# Altium PCB Capstone.PcbDoc
Units mil, origin at the board's own origin, x right, y up, seen from the top; angles counter-clockwise.
Board outline 3925 x 3665 mil, 2 copper layers (Top Layer, Bottom Layer), stack 61 mil thick; 57 components, 53 nets, 243 pads, 71 vias.
Unrouted connection lines stored in the file: 29.
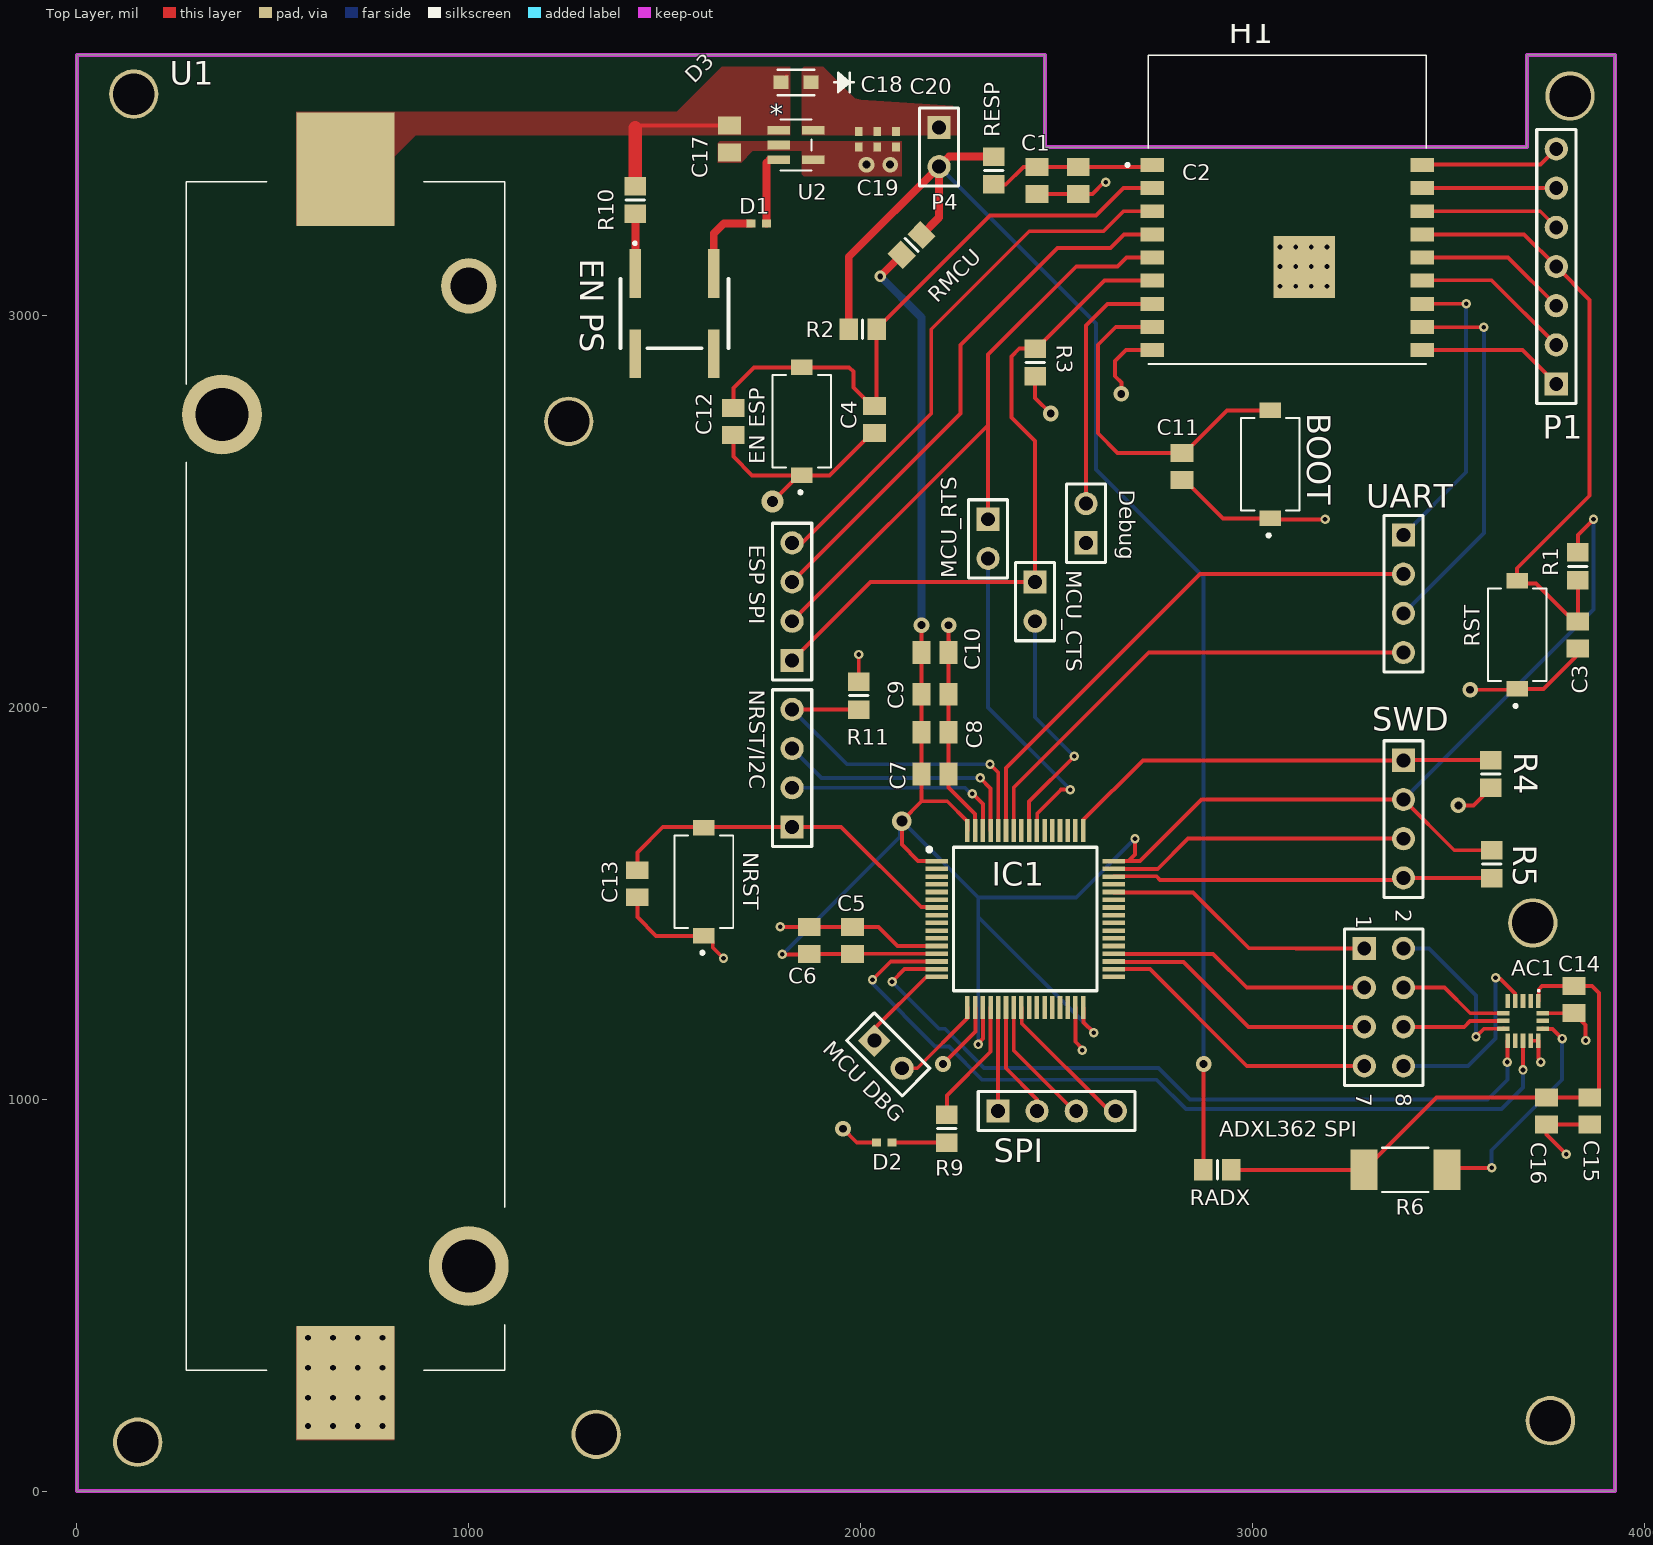
[diagram p0: Top Layer view]
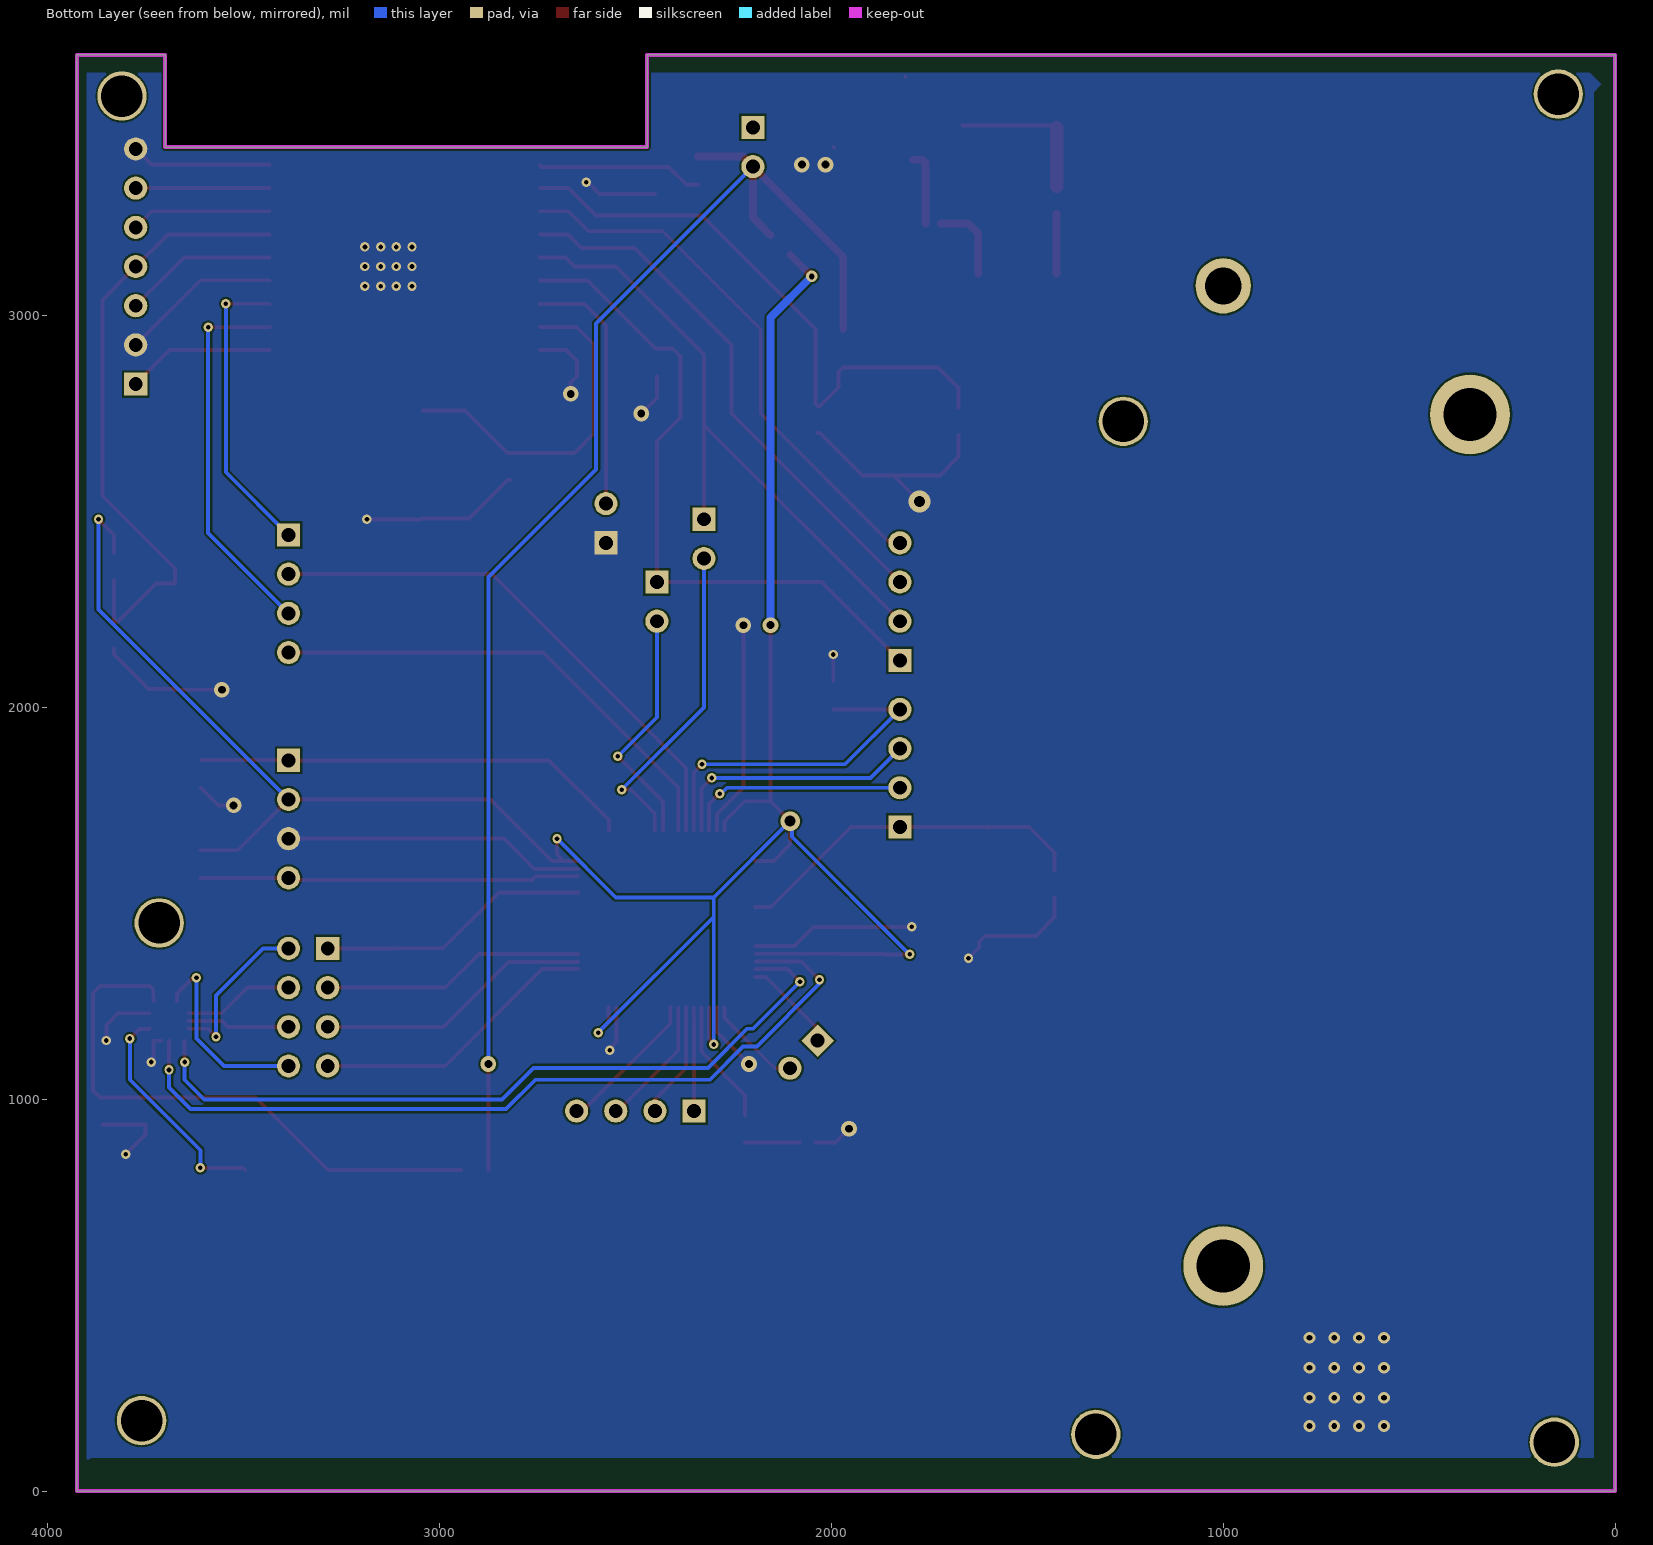
[diagram p1: Bottom Layer view, seen from below]

## Layer stack, top to bottom
Top Solder: solder mask 1, SM-001, Dk 4
Top Layer: signal copper 1.4
Dielectric 1: core 58.2, Core-043, Dk 4.3
Bottom Layer: signal copper 1.4
Bottom Solder: solder mask 1, SM-001, Dk 4

## Board outline
0,0 0,3665 2470,3665 2470,3430 3700,3430 3700,3665 3925,3665 3925,0
cut-out: -815,3120

## Design rules (kind name [scope] priority, off if disabled: settings)
Clearance [All] p1: gap=5 ignorepadtopadclearanceinfootprint=FALSE
DiffPairsRouting [All] p1: maxlimit=10 minlimit=5 mostfreqgap=10 toplayer_minwidth=15 toplayer_maxwidth=15 toplayer_prefwidth=15 bottomlayer_minwidth=15 bottomlayer_maxwidth=15 bottomlayer_prefwidth=15 maxuncoupledlength=500
HoleSize [All] p1: absolutevalues=TRUE maxlimit=200 minlimit=1 maxpercent=80.000 minpercent=20.000
MinimumSolderMaskSliver [All] p1: minsoldermaskwidth=0
PolygonConnect [All] p1: connectstyle=Direct reliefconductorwidth=10 reliefentries=4 polygonreliefangle="90 Angle" airgapwidth=10
RoutingVias [All] p1: holewidth=12 width=24 viastyle="Through Hole" minholewidth=12 minwidth=24 maxholewidth=28 maxwidth=50
SilkToSolderMaskClearance [IsPad] p1: minsilkscreentomaskgap=5 clearancetoexposedcopper=TRUE
SolderMaskExpansion [All] p1: expansion=4
Width [All] p1: maxlimit=35 minlimit=5 preferedwidth=10
26 further rules are at their usual default settings.

## Components (designator, comment, footprint, x,y, rotation, side; value= is the part's Value field where it differs from the comment)
AC1 "ADXL362BCCZ-RL7" CC-16-4 3690,1200 r270 top
"ADXL362 SPI" "Header 4X2" HDR2X4 3285,1385 r270 top
BOOT "KSR222GLFS" *SW_KSR223GLFG 3045,2620 r90 top
C1 "Cap" *CAPC2012X88N 2450,3345 r270 top value=10uF
C2 "Cap" *CAPC2012X88N 2555,3345 r270 top value=0.1uF
C3 "Cap" *CAPC2012X88N 3830,2185 r270 top value=0.1uF
C4 "Cap" *CAPC2012X88N 2035,2735 r270 top value=0.1uF
C5 "Cap" *CAPC2012X88N 1979,1405.55 r270 top value=10nF
C6 "Cap" *CAPC2012X88N 1869,1405.55 r270 top value=1uF
C7 "Cap" *CAPC2012X88N 2190,1830 r180 top value=4.7uF
C8 "Cap" *CAPC2012X88N 2190,1936.67 r180 top value=100nF
C9 "Cap" *CAPC2012X88N 2190,2033.33 r180 top value=100nF
C10 "Cap" *CAPC2012X88N 2190,2140 r180 top value=100nF
C11 "Cap" *CAPC2012X88N 2820,2615 r90 top value=0.1uF
C12 "Cap" *CAPC2012X88N 1675,2730 r90 top value=0.1uF
C13 "Cap" *CAPC2012X88N 1430,1550 r90 top value=0.1uF
C14 "Cap" *CAPC2012X88N 3820,1254.45 r270 top value=1uF
C15 "Cap" *CAPC2012X88N 3860,970 r90 top value=0.1uF
C16 "Cap" *CAPC2012X88N 3750,970 r270 top value=1uF
C17 "Cap" *CAPC2012X88N 1665,3450 r90 top value=1uF
C18 "Cap" 0402 1995,3450 r90 top value=10uF
C19 "Cap" 0402 2042.5,3450 r90 top value=10uF
C20 "Cap" 0402 2090,3450 r90 top value=4.7uF
D1 "RED_LED" 0402 1740,3235 r0 top
D2 "GREEN_LED" 0402 2060,890 r180 top
D3 "RED_LED" SD0805 1835,3595 r180 top
Debug "Header 2" HDR1X2 2575,2420 r90 top
"EN ESP" "KSR222GLFS" *SW_KSR223GLFG 1850,2730 r90 top (schematic designator EN_ESP)
"EN PS" "GT12MSCBETR" GT11MSCBE 1525,3005 r90 top
"ESP SPI" "Header 4" HDR1X4 1825,2120 r90 top
H1 "ESP-WROOM-02D" ESPWROOM02D 3060,3270 r0 top locked
IC1 "STM32L433RCT6" QFP50P1200X1200X160-64N 2420,1460 r0 top locked
"MCU DBG" "Debug" HDR1X2 2035,1150 r315 top
MCU_CTS "Header 2" HDR1X2 2445,2320 r270 top
MCU_RTS "Header 2" HDR1X2 2325,2480 r270 top
NRST "KSR222GLFS" *SW_KSR223GLFG 1600,1555 r90 top
NRST/I2C "Header 4" HDR1X4 1825,1695 r90 top
P1 "Comment" HDR1X7 3775,2825 r90 top
P4 "Header 2" HDR1X2 2200,3480 r270 top
R1 "Res1" 6-0805_N 3830,2360 r270 top value=10K
R2 "Res1" 6-0805_N 2005,2965 r0 top value=10K
R3 "Res1" 6-0805_N 2445,2880 r90 top value=10K
R4 "Res1" 6-0805_N 3608.05,1830 r270 top value=10K
R5 "Res1" 6-0805_N 3610,1600 r90 top value=10k
R6 "Res1" RES_WSC_2515 3390,820 r180 top value=50
R9 "Res1" 6-0805_N 2220,925 r90 top value=470
R10 "Res1" 6-0805_N 1425,3295 r270 top value=470
R11 "Res1" 6-0805_N 1995,2030 r90 top value=10K
RADX "3.3K" 6-0805_N 2910,820 r180 top
RESP "" 6-0805_N 2340,3370 r90 top value=0
RMCU "Res1" 6-0805_N 2130,3180 r45 top value=0
RST "KSR222GLFS" *SW_KSR223GLFG 3675,2185 r90 top
SPI "" HDR1X4 2350,970 r0 top
SWD "Comment" HDR1X4 3385,1865 r270 top
U1 "1042P" 1042P 685,1825 r90 top
U2 "Part Number: TLV75533PDBVR" DBV5 1835,3435 r0 top value=Value
UART "Comment" HDR1X4 3385,2440 r270 top

## Footprints (in the part's own frame and the unit in brackets; to place one, negate y for a bottom-side part, rotate by r counter-clockwise, add the part's x,y. Pads: shape width x height; smd on the part's side, far side on the other; paste and mask are expansions set on the pad)
6-0805_N [mm] "Chip Resistor, Body 2.0x1.2mm, IPC Medium Density"
  rect 1.2x1.4 smd: 1(-0.9,0) 2(0.9,0)
  silkscreen extent 0,-0.6 0,0.6, body extent -1.07,-0.7 1.07,0.7, height 0.7
0402 [mm] "Chip Capacitor, Body 1.0x0.5mm, IPC High Density"
  rect 0.6x0.5 smd: 1(-0.5,0) 2(0.5,0)
  body extent -0.55,-0.3 0.55,0.3, height 1.3
1042P [mm]
  round 5.175 hole 3.45: 1(-31.765,-8) 2(23.435,8)
  round 3.585 hole 2.39: 3(31.765,-8)
  rect 7.34x6.35 smd: 4(-39.33,0) 5(39.33,0)
  silkscreen extent -38.53,-10.33 38.53,10.33, body extent -42.37,-10.33 42.37,10.33, height 14.1
*CAPC2012X88N [mm]
  rect 1.16x1.47 smd: 1(-0.875,0) 2(0.875,0)
*SW_KSR223GLFG [mm]
  rect 1x1.4 smd: 1(-3.5,0) 2(3.5,0)
  silkscreen extent -4.7,-1.9 3,1.9
CC-16-4 [mm]
  rect 0.925x0.3 smd: 1(-1.288,1) 2(-1.288,0.5) 3(-1.288,0) 4(-1.288,-0.5) 5(-1.288,-1) 9(1.287,-1) 10(1.287,-0.5) 11(1.287,0) 12(1.287,0.5) 13(1.287,1)
  rect 0.3x0.8 smd: 6(-0.5,-1.275) 7(0,-1.275) 8(0.5,-1.275) 14(0.5,1.275) 15(0,1.275) 16(-0.5,1.275)
  silkscreen extent -1.98,1 -1.93,1.04
DBV5 [mil]
  rect 58x22 smd paste+0 mask+0: 1(-44,37.4) 2(-44,0) 3(-44,-37.4) 4(44,-37.4) 5(44,37.4)
  silkscreen extent -40,-65 40,65, body extent 0,0 10,10, height 10
ESPWROOM02D [mm]
  rect 1.5x0.9 smd: 1(-8.025,2.9) 2(-8.025,1.4) 3(-8.025,-0.1) 4(-8.025,-1.6) 5(-8.025,-3.1) 6(-8.025,-4.6) 7(-8.025,-6.1) 8(-8.025,-7.6) 9(-8.025,-9.1) 10(9.475,-9.1) 11(9.475,-7.6) 12(9.475,-6.1) 13(9.475,-4.6) 14(9.475,-3.1) 15(9.475,-1.6) 16(9.475,-0.1) 17(9.475,1.4) 18(9.475,2.9)
  rect 4x4 smd: 19(1.825,-3.71)
  silkscreen extent -9.72,-10 9.72,10
GT11MSCBE [mm]
  rect 3.17x0.76 smd: 1(2.605,2.54) 3(2.605,-2.54) 4(-2.605,2.54) 6(-2.605,-2.54)
  silkscreen extent -2.25,-3.5 4.61,3.5
HDR1X2 [mm] "Connector; Header; 2 Position"
  rect 1.5x1.5 hole 0.9: 1(0,0)
  round 1.5 hole 0.9: 2(2.54,0)
  silkscreen extent -1.27,-1.27 3.81,1.27
HDR1X4 [mm] "Connector; Header; 4 Position"
  rect 1.5x1.5 hole 0.9: 1(0,0)
  round 1.5 hole 0.9: 2(2.54,0) 3(5.08,0) 4(7.62,0)
  silkscreen extent -1.27,-1.27 8.89,1.27
HDR1X7 [mm] "Connector; Header; 7 Position"
  rect 1.5x1.5 hole 0.9: 1(0,0)
  round 1.5 hole 0.9: 2(2.54,0) 3(5.08,0) 4(7.62,0) 5(10.16,0) 6(12.7,0) 7(15.24,0)
  silkscreen extent -1.27,-1.27 16.51,1.27
HDR2X4 [mm] "Connector; Header; 4x2 Position"
  rect 1.5x1.5 hole 0.9: 1(0,0)
  round 1.5 hole 0.9: 2(0,2.54) 3(2.54,0) 4(2.54,2.54) 5(5.08,0) 6(5.08,2.54) 7(7.62,0) 8(7.62,2.54)
  silkscreen extent -1.27,-1.27 8.89,3.81
QFP50P1200X1200X160-64N [mm]
  rect 1.475x0.3 smd: 1(-5.738,3.75) 2(-5.738,3.25) 3(-5.738,2.75) 4(-5.738,2.25) 5(-5.738,1.75) 6(-5.738,1.25) 7(-5.738,0.75) 8(-5.738,0.25) 9(-5.738,-0.25) 10(-5.738,-0.75) 11(-5.738,-1.25) 12(-5.738,-1.75) 13(-5.738,-2.25) 14(-5.738,-2.75) 15(-5.738,-3.25) 16(-5.738,-3.75) 33(5.738,-3.75) 34(5.738,-3.25) 35(5.738,-2.75) 36(5.738,-2.25) 37(5.738,-1.75) 38(5.738,-1.25) 39(5.738,-0.75) 40(5.738,-0.25) 41(5.738,0.25) 42(5.738,0.75) 43(5.738,1.25) 44(5.738,1.75) 45(5.738,2.25) 46(5.738,2.75) 47(5.738,3.25) 48(5.738,3.75)
  rect 0.3x1.475 smd: 17(-3.75,-5.738) 18(-3.25,-5.738) 19(-2.75,-5.738) 20(-2.25,-5.738) 21(-1.75,-5.738) 22(-1.25,-5.738) 23(-0.75,-5.738) 24(-0.25,-5.738) 25(0.25,-5.738) 26(0.75,-5.738) 27(1.25,-5.738) 28(1.75,-5.738) 29(2.25,-5.738) 30(2.75,-5.738) 31(3.25,-5.738) 32(3.75,-5.738) 49(3.75,5.738) 50(3.25,5.738) 51(2.75,5.738) 52(2.25,5.738) 53(1.75,5.738) 54(1.25,5.738) 55(0.75,5.738) 56(0.25,5.738) 57(-0.25,5.738) 58(-0.75,5.738) 59(-1.25,5.738) 60(-1.75,5.738) 61(-2.25,5.738) 62(-2.75,5.738) 63(-3.25,5.738) 64(-3.75,5.738)
  silkscreen extent -6.35,-4.65 4.65,4.65, body extent -6,-6 6,6, height 1.6
RES_WSC_2515 [mil]
  rect 69x103 smd paste+0 mask+0: 1(-105.5,0) 2(105.5,0)
  silkscreen extent -59,-57 59,57, body extent 0,0 10,10, height 10
SD0805 [mil]
  rect 37.5x35 smd paste+0 mask+0: 1(-38.25,0) 2(38.25,0)
  silkscreen extent -147,-33 47,33, body extent 0,0 10,10, height 10

## Part data
AC1: "Accelerometer", Manufacturer_Name="Analog Devices", Mouser Part Number=584-ADXL362BCCZ-R7, Datasheet Link=http://www.analog.com/media/en/technical-documentation/data-sheets/ADXL362.pdf, Manufacturer_Part_Number=ADXL362BCCZ-RL7, Mouser Price/Stock=https://www.mouser.com/Search/Refine.aspx?Keyword=584-ADXL362BCCZ-R7
"ADXL362 SPI": "Header, 4-Pin, Dual row", LatestRevisionDate=17-Jul-2002, LatestRevisionNote="Re-released for DXP Platform.", Publisher="Altium Limited"
BOOT "EN ESP" NRST RST: library part KSR223GLFG, "Switch Tactile N.O. SPST Round Button Gull Wing 0.01A 32VDC 0.2VA 200000Cycles 2N SMD Automotive T/R", Package=None, Digi-Key_Part_Number=401-1704-1-ND, Digi-Key_Purchase_URL=https://www.digikey.com/product-detail/en/c-k/KSR223GLFG/401-1704-1-ND/958078?utm_source=snapeda&utm_medium=aggregator&utm_campaign=symbol, MF=C&K, MP=KSR223GLFG, SnapEDA_Link=https://www.snapeda.com/parts/KSR223GLFG/C%26K/view-part/?ref=snap
C1 C2 C3 C4 C5 C6 C7 C8 C9 C10 C11 C12 C13 C14 C15 C16 C17 C18 C19 C20: "Capacitor", LatestRevisionDate=17-Jul-2002, LatestRevisionNote="Re-released for DXP Platform.", PackageDescription="Radial Cap, Thru-Hole; 2 Leads; 0.3 in Pin Spacing", PackageReference=RAD-0.3, Published=8-Jun-2000, Publisher="Altium Limited"
D1 D2: library part LED3, "Typical BLUE SiC LED", DatasheetVersion=16-Apr-2002, LatestRevisionDate=17-Dec-2003, LatestRevisionNote="PCB Footprint replaced.", PackageDescription="SM LED; 2 C-Bend Leads; Body 3.5 x 2.8 x 1.9 mm, inc leads (LxWxH typ)", PackageReference=3.5X2.8X1.9, PackageVersion=16-Apr-2002, Published=8-Jun-2000, Publisher="Altium Limited"
D3: library part "D Schottky", "Schottky Diode", Code_JEDEC=DO-214-AA, LatestRevisionDate=17-Jul-2002, LatestRevisionNote="Re-released for DXP Platform.", PackageDescription="DO-214-AA/SMB; 2 C-Bend Leads; Body 5.3 x 3.6 mm, inc. leads (LxW)", PackageReference=SMB, Published=8-Jun-2000, Publisher="Altium Limited"
Debug MCU_CTS MCU_RTS P4: "Header, 2-Pin", LatestRevisionDate=17-Jul-2002, LatestRevisionNote="Re-released for DXP Platform.", Publisher="Altium Limited"
"EN PS": "Switch", Manufacturer_Name="C & K COMPONENTS", Mouser Part Number=611-GT12MSCBETR, Datasheet Link=https://componentsearchengine.com/Datasheets/1/GT12MSCBETR.pdf, Manufacturer_Part_Number=GT12MSCBETR, Mouser Price/Stock=https://www.mouser.com/Search/Refine.aspx?Keyword=611-GT12MSCBETR
"ESP SPI" NRST/I2C: "Header, 4-Pin", LatestRevisionDate=17-Jul-2002, LatestRevisionNote="Re-released for DXP Platform.", Publisher="Altium Limited"
H1: "Hardware", Manufacturer_Name=Espressif, Mouser Part Number=356-ESPWROOM-02D, Datasheet Link=https://br.mouser.com/datasheet/2/891/esp-wroom-02d_esp-wroom-02u_datasheet_en-1365835.pdf, Height=3.2mm, Manufacturer_Part_Number=ESP-WROOM-02D
IC1: "Integrated Circuit", Manufacturer_Name=STMicroelectronics, Mouser Part Number=511-STM32L433RCT6, Datasheet Link=https://www.st.com/resource/en/datasheet/stm32l433rc.pdf, Height=1.6mm, Manufacturer_Part_Number=STM32L433RCT6, Mouser Price/Stock=https://www.mouser.com/Search/Refine.aspx?Keyword=511-STM32L433RCT6
"MCU DBG": library part "Header 2", "Header, 2-Pin", LatestRevisionDate=17-Jul-2002, LatestRevisionNote="Re-released for DXP Platform.", Publisher="Altium Limited"
P1: library part "Header 7", "Header, 7-Pin", LatestRevisionDate=17-Jul-2002, LatestRevisionNote="Re-released for DXP Platform.", Publisher="Altium Limited"
R1 R2 R3 R4 R5 R6 R9 R10 R11 RMCU: "Resistor", LatestRevisionDate=17-Jul-2002, LatestRevisionNote="Re-released for DXP Platform.", PackageDescription="Axial Device, Thru-Hole; 2 Leads; 0.3 in Pin Spacing", PackageReference=AXIAL-0.3, Published=8-Jun-2000, Publisher="Altium Limited"
RADX RESP: library part Res1, "Resistor", LatestRevisionDate=17-Jul-2002, LatestRevisionNote="Re-released for DXP Platform.", PackageDescription="Axial Device, Thru-Hole; 2 Leads; 0.3 in Pin Spacing", PackageReference=AXIAL-0.3, Published=8-Jun-2000, Publisher="Altium Limited"
SPI SWD UART: library part "Header 4", "Header, 4-Pin", LatestRevisionDate=17-Jul-2002, LatestRevisionNote="Re-released for DXP Platform.", Publisher="Altium Limited"
U1: "Undefined or Miscellaneous", Manufacturer_Name="Keystone Electronics", Mouser Part Number=534-1042P, Allied_Number=71135189, Allied Price/Stock=https://www.alliedelec.com/keystone-electronics-1042p/71135189/, Datasheet Link=http://www.keyelco.com/product-pdf.cfm?p=13957, Height=14mm, Manufacturer_Part_Number=1042P, Mouser Price/Stock=https://www.mouser.com/Search/Refine.aspx?Keyword=534-1042P
U2: library part TLV75533PDBVR, "No Description Available", Copyright="Copyright (C) 2018 Accelerated Designs. All rights reserved", Manufacturer_Part_Number=TLV75533PDBVR, RefDes=RefDes, Type=DEV, Vendor="Texas Instruments"

## Free pads (board coordinates)
  round 126 hole 106 unplated: 1(145,3565) 2(155,125) 3(1255,2730) 4(1325,145) 5(3760,180) 6(3715,1450) 7(3810,3560)

## Via types
v1: diameter 24, hole 12, Top Layer to Bottom Layer, 41 vias
v2: diameter 30, hole 15, Top Layer to Bottom Layer, 17 vias
v3: diameter 40, hole 20, Top Layer to Bottom Layer, 11 vias
v4: diameter 50, hole 28, Top Layer to Bottom Layer, 1 vias
v5: diameter 56, hole 28, Top Layer to Bottom Layer, 1 vias

## Nets (pads, with @x,y where several pads share a name; then routed paths per layer and width w, separated by ;. In a path a pad name is that pad's centre, name@x,y a point inside that pad or via, vN(x,y) a via of type N, cw(c..) or ccw(c..) an arc to the next point about the centre after c; other vN are vias at no path point)
ADXL362_CS: "ADXL362 SPI.2" AC1.8 | length 417.9
  Top Layer w10: v1(3570,1160) 3590,1180 3639.49,1180 AC1.8
  Bottom Layer w10: 3385,1385 3450,1385 3570,1265 v1(3570,1160)
ADXL362_INT1: AC1.11 IC1.14 | length 2128.1
  Top Layer w10: v1(2030,1305) 2076.73,1351.73 IC1.14 ; v1(3690,1075) AC1.11
  Bottom Layer w10: v1(2030,1305) 2030,1295 2190,1135 2225,1135 2310,1050 2755,1050 2830,975 3635,975 3690,1030 v1(3690,1075)
ADXL362_INT2: AC1.9 IC1.15 | length 1941.9
  Top Layer w10: v1(2080,1300) 2112.05,1332.05 IC1.15 ; v1(3650,1095) 3650.63,1095.63 AC1.9
  Bottom Layer w10: v1(2080,1300) 2200,1180 2215,1180 2315,1080 2760,1080 2840,1000 3600,1000 3650,1050 v1(3650,1095)
ADXL362_MISO: "ADXL362 SPI.6" AC1.7 | length 261
  Top Layer w10: 3385,1185 3540,1185 3555,1200 AC1.7
ADXL362_MOSI: "ADXL362 SPI.4" AC1.6 | length 281.9
  Top Layer w10: 3385,1285 3490,1285 3555.31,1219.69 AC1.6
ADXL362_SCK: "ADXL362 SPI.8" AC1.4 | length 504.8
  Top Layer w10: v1(3620,1310) 3622.68,1307.32 3632.26,1307.32 3669.41,1270.17 3669.41,1251.6 AC1.4
  Bottom Layer w10: 3385,1085 3550,1085 3620,1155 v1(3620,1310)
EN: "EN ESP.2" C4.1 C12.2 H1.2 R2.2 | length 1547.7
  Top Layer w10: C12.2 1675,2815 1727.8,2867.8 1850,2867.8 1970.55,2867.8 1981.67,2856.67 1981.67,2816.67 2028.9,2769.45 C4.1 2040.43,2774.88 R2.2 2040.43,2965.94 2329.49,3255 2600,3255 2670.12,3325.12 H1.2
GND: "EN ESP.1" AC1.12 AC1.13 AC1.16 BOOT.1 C1.2 C2.2 C3.2 C4.2 C5.1 C6.1 C7.1 C8.1 C9.1 C10.1 C11.1 C12.1 C13.1 C14.2 C15.1 C16.2 C17.1 C18.1 C19.1 C20.1 D2.2 Debug.1 H1.9 H1.13 H1.18 H1.19 IC1.12 IC1.18 IC1.31 IC1.47 IC1.63 NRST.1 P1.2 P1.7 R3.1 R4.2 R11.2 RST.1 SWD.3 U1.4 U2.2 U2.4 | length 5657.2
  Top Layer w10: C13.1 1430,1465 1477.8,1417.2 NRST.1 1607.87,1417.2 1622.56,1402.52 1622.56,1387.44 v1(1650,1360) ; C12.1 1675,2640 1722.8,2592.2 1850,2592.2 1920.55,2592.2 2028.9,2700.55 C4.2 ; v5(1775,2525) 1775,2525.08 1839.92,2590 ; v1(1795,1440) C6.1 C5.1 2045,1440 2093.9,1391.1 IC1.12 ; v3(1955,925) 1990,890 D2.2 ; C18.1@1992.5,3427.81 C18.1 ; R11.2 v1(1995,2135) ; v3(2210,1090) 2292.79,1172.79 2292.79,1233.36 IC1.18 ; v3(2224.45,2209.45) 2224.45,2171.1 2225,2170.55 2224.45,2170 C10.1 C9.1 C8.1 C7.1 2224.45,1795.55 2292.05,1727.95 IC1.63 ; R3.1 2445,2790 v3(2485,2750) ; C1.2 C2.2 2591.76,3310.55 2621.21,3340 v1(2625,3340) ; IC1.31 2547.95,1146.92 2565,1129.87 v1(2565,1125) ; IC1.47 2757.95,1587.95 2835,1665 SWD.3 ; v3(2665,2800) 2665,2829.14 2649.14,2845 2649.14,2884.14 2676.73,2911.73 H1.9 ; C11.1 2826.1,2580.55 2924.45,2482.2 BOOT.1 3047.2,2480 v1(3185,2480) ; H1.13 3434.13,3090 3610,3090 P1.2 ; H1.18 3433.86,3385 3735,3385 P1.7 ; v3(3525,1750) 3563.49,1750 R4.2 ; v3(3555,2045) 3677.2,2045 RST.1 3741.81,2047.2 3830,2135.39 C3.2 ; AC1.12 AC1.13 3729.37,1104.42 3735,1098.79 v1(3735,1095) ; AC1.16 3819.69,1219.69 3850,1189.37 v1(3850,1150) ; C16.2 C16.2@3756.1,935.55 ; v1(3800,860) 3750,910 3750,929.45 C16.2@3756.1,935.55 ; C15.1 C16.2@3756.1,935.55
  other v1: 3070,3075 3110,3075 3150,3075 3190,3075 3070,3125 3110,3125 3150,3125 3190,3125 3070,3175 3110,3175 3150,3175 3190,3175
  other v2: 590,166.67 653.33,166.67 716.67,166.67 780,166.67 590,238.33 653.33,238.33 716.67,238.33 780,238.33 590,315 653.33,315 716.67,315 780,315 590,391.67 653.33,391.67 716.67,391.67 780,391.67
  other v3: 2015,3385 2075,3385
I2C1_SCL: IC1.61 NRST/I2C.3 | length 656.1
  Top Layer w10: v1(2305,1820) 2331.42,1793.58 IC1.61
  Bottom Layer w10: NRST/I2C.3 1900,1820 v1(2305,1820)
I2C1_SDA: IC1.62 NRST/I2C.2 | length 571.4
  Top Layer w10: v1(2285,1780) 2311.73,1753.27 IC1.62
  Bottom Layer w10: NRST/I2C.2 2266.21,1795 2281.21,1780 v1(2285,1780)
IO0: BOOT.2 C11.2 H1.8 | length 886
  Top Layer w10: H1.8 2650.79,2970.79 2605,2925 2605,2700 2655.55,2649.45 C11.2 2826.1,2649.45 2934.45,2757.8 BOOT.2@3042.2,2757.8
IO2: Debug.2 H1.7 | length 646.8
  Top Layer w10: Debug.2 2575,2975 2629.84,3029.84 H1.7
IO4: H1.10 P1.1 | length 377.9
  Top Layer w10: H1.10 3688.27,2911.73 P1.1
IO5: H1.14 P1.3 | length 392.9
  Top Layer w10: H1.14 3652.05,3147.95 P1.3
IO12: "ESP SPI.3" H1.4 | length 1389
  Top Layer w10: 1825,2320 2255,2750 2255,2925 2502.5,3172.5 2637.5,3172.5 2672.01,3207.01 H1.4
IO13: "ESP SPI.2" H1.5 MCU_RTS.1 | length 1648.9
  Top Layer w10: 1825,2220 2325,2720 ; MCU_RTS.1 2325,2720 ; H1.5 2677.95,3147.95 2655,3125 2550,3125 2325,2900 2325,2720
IO14: "ESP SPI.4" H1.3 | length 1395.5
  Top Layer w10: 1825,2420 1850,2420 2180,2750 2180,2965 2430,3215 2620,3215 2671.06,3266.06 H1.3
IO15: "ESP SPI.1" H1.6 MCU_CTS.1 R3.2 | length 1742.6
  Top Layer w10: 1825,2120 2025,2320 MCU_CTS.1 2445,2680 2385,2740 2385,2895.87 2404.57,2915.43 R3.2 2448.94,2915.43 2622.4,3088.9 H1.6
IO16: H1.17 P1.6 | length 342
  Top Layer w10: H1.17 3433.15,3325 P1.6
NetAC1_1: AC1.1 C14.1 C15.2 C16.1 R6.2 RADX.1 | length 1465.7
  Top Layer w10: RADX.1 R6.2 3468.95,1004.45 C16.1 C15.2 3866.1,1004.45 3883.94,1022.28 3883.94,1271.06 3866.1,1288.9 C14.1 3738.9,1288.9 3730.28,1280.28 3730.28,1263.9 3729.37,1262.99 AC1.1
NetAC1_14: AC1.14 R6.1 | length 581.4
  Top Layer w10: R6.1 3500.5,825 v1(3610,825) ; AC1.14 3741.1,1179.41 3765.59,1179.41 v1(3790,1155)
  Bottom Layer w10: v1(3610,825) 3610,870 3790,1050 v1(3790,1155)
NetBT1_1: C17.2 D3.2 R10.1 U1.5 U2.1 | length 390.6
  Top Layer w10: 1425,3478.59 1430.86,3484.45 C17.2
  Top Layer w35: R10.1 1425,3478.59
NetC1_1: C1.1 C2.1 H1.1 RESP.1 | length 424.6
  Top Layer w10: RESP.1 2370.12,3334.57 2415,3379.45 C1.1 C2.1 2739.33,3379.45 H1.1
NetC13_2: C13.2 IC1.7 NRST.2 NRST/I2C.1 | length 923.5
  Top Layer w10: C13.2 1430,1630 1495,1695 1597.8,1695 NRST.2 1602.2,1695 NRST/I2C.1 1950,1695 2154.57,1490.43 2193.19,1490.43 IC1.7
NetC18_2: C18.2 C19.2 C20.2 D3.1 P4.1 U2.5 | length 14.6
  Top Layer w10: P4.1@2189.69,3469.69 P4.1
NetD1_1: "EN PS.3" D1.1 | length 207.6
  Top Layer w20: 1625,3107.56 1625,3209.14 1650.86,3235 D1.1
NetD1_2: D1.2 U2.3 | length 189.3
  Top Layer w20: D1.2 1759.69,3389.69 1767.6,3397.6 U2.3
NetD2_1: D2.1 R9.1 | length 140.5
  Top Layer w10: D2.1 2219.57,890 R9.1
"NetEN PS_1": "EN PS.1" R10.2 | length 152
  Top Layer w20: 1425,3107.56 R10.2
NetH1_11: H1.11 UART.3 | length 972.2
  Top Layer w10: H1.11 3433.82,2970 v1(3590,2970)
  Bottom Layer w10: UART.3 3590,2445 v1(3590,2970)
NetH1_12: H1.12 UART.1 | length 768.3
  Top Layer w10: H1.12 3433.19,3030 v1(3545,3030)
  Bottom Layer w10: UART.1 3545,2600 v1(3545,3030)
NetIC1_16: "MCU DBG.1" IC1.16 | length 244.2
  Top Layer w10: 2034.29,1150 2034.29,1179.29 2167.36,1312.36 IC1.16
NetIC1_17: "MCU DBG.2" IC1.17 | length 246.4
  Top Layer w10: 2105.71,1079.29 2144.29,1079.29 2272.36,1207.36 IC1.17
NetIC1_20: IC1.20 R9.2 | length 319.8
  Top Layer w10: R9.2 2220,1010 2331.42,1121.42 IC1.20
PH3-BOOT0: IC1.60 NRST/I2C.4 R11.1 | length 911
  Top Layer w10: NRST/I2C.4 1994.57,1995 R11.1 ; v1(2330,1855) 2351.1,1833.9 IC1.60
  Bottom Layer w10: NRST/I2C.4 1965,1855 v1(2330,1855)
RST: C3.1 H1.15 P1.4 R1.2 RST.2 | length 1590.4
  Top Layer w10: H1.15 3692.99,3207.01 P1.4 3860,3040 3860,2540 3675,2355 RST.2 ; RST.2@3675,2316.69 3723.31,2316.69 3820.55,2219.45 C3.1 3830,2235 R1.2
SPI1_CS: IC1.24 SPI.4 | length 372.2
  Top Layer w10: IC1.24 2411.06,1233.19 2411.06,1193.94 2635,970 SPI.4
SPI1_MISO: IC1.22 SPI.2 | length 296.9
  Top Layer w10: IC1.22 2370.79,1079.21 2450,1000 SPI.2
SPI1_MOSI: IC1.23 SPI.3 | length 333.1
  Top Layer w10: IC1.23 2390.47,1124.53 2545,970 SPI.3
SPI1_SCK: IC1.21 SPI.1 | length 264.6
  Top Layer w10: SPI.1 2350,1202.18 2351.1,1203.28 IC1.21
SPI2_CS: "ADXL362 SPI.1" IC1.44 | length 698.7
  Top Layer w10: IC1.44 2646.81,1527.99 2847.99,1527.99 2990.43,1385.55 3110.66,1385.55 3111.21,1385 3285,1385
SPI2_MISO: "ADXL362 SPI.5" IC1.35 | length 708.2
  Top Layer w10: IC1.35 2646.77,1350.87 2824.13,1350.87 2990,1185 3285,1185
SPI2_MOSI: "ADXL362 SPI.3" IC1.36 | length 674.9
  Top Layer w10: IC1.36 2646.77,1370.55 2899.45,1370.55 2985,1285 3285,1285
SPI2_SCK: "ADXL362 SPI.7" IC1.34 | length 741.4
  Top Layer w10: IC1.34 2737.95,1332.05 2985,1085 3285,1085
STLINK_SWCLK: IC1.49 R4.1 SWD.1 | length 1130.4
  Top Layer w10: IC1.49 2567.64,1709.04 2567.64,1712.64 2720,1865 SWD.1 3385.43,1865.43 R4.1
STLINK_SWDIO: IC1.46 R5.1 SWD.4 | length 967.2
  Top Layer w10: IC1.46@2646.81,1569.17 2755,1569.17 2764.17,1560 SWD.4@3385,1560 ; SWD.4 3609.57,1565 R5.1
Tout: H1.16 P1.5 | length 359
  Top Layer w10: H1.16 3733.94,3266.06 P1.5
USART1_CTS: IC1.56 MCU_CTS.2 | length 623.2
  Top Layer w10: IC1.56 2429.84,1759.84 v1(2545,1875)
  Bottom Layer w10: MCU_CTS.2 2445,1975 v1(2545,1875)
USART1_RTS: IC1.55 MCU_RTS.2 | length 830.2
  Top Layer w10: IC1.55 2450.43,1686.81 2450.43,1728.82 2511.61,1790 v1(2535,1790)
  Bottom Layer w10: MCU_RTS.2 2325,2000 v1(2535,1790)
USART1_RX: IC1.59 UART.2 | length 1378.3
  Top Layer w10: IC1.59 2370.79,1844.98 2865.81,2340 UART.2
USART1_TX: IC1.58 UART.4 | length 1246.8
  Top Layer w10: IC1.58 2390.47,1795.47 2735,2140 UART.4
VDD33: P4.2 R2.1 RADX.2 RESP.2 RMCU.2 | length 3694.9
  Top Layer w10: RADX.2@2874.94,819.62 RADX.2 2875,820.43 v3(2875,1090)
  Top Layer w20: R2.1 1969.57,3149.57 P4.2 ; RMCU.2 2200,3250 P4.2 ; RESP.2 2225.43,3405.43 P4.2
  Bottom Layer w10: P4.2 2600,2980 2600,2607.5 2875,2332.5 v3(2875,1090)
VDD_MCU: C5.2 C6.2 C7.2 C8.2 C9.2 C10.2 IC1.1 IC1.13 IC1.19 IC1.32 IC1.48 IC1.64 R1.1 R5.2 RMCU.1 SWD.2 | length 6603.9
  Top Layer w10: v1(1800,1370) 1867.9,1370 C6.2 C5.2 1979.31,1371.42 IC1.13 ; v3(2155,2210) 2155,2140.55 C10.2 C9.2 C8.2 C7.2 2155.55,1760.55 ; IC1.1 2170.97,1607.64 2170.06,1608.54 2146.46,1608.54 2105,1650 v4(2105,1710) 2155.55,1760.55 ; IC1.64 2272.36,1709.04 2220.85,1760.55 2155.55,1760.55 ; v1(2300,1140) 2300,1143.79 2311.73,1155.52 IC1.19 ; IC1.32 2568.54,1233.19 2568.54,1196.46 v1(2595,1170) ; IC1.48 IC1.48@2669.04,1607.64 ; v1(2700,1665) 2700,1625 2683.54,1608.54 2669.94,1608.54 IC1.48@2669.04,1607.64 ; R5.2 3514.57,1635.43 SWD.2 2870,1765 2712.64,1607.64 IC1.48@2669.04,1607.64 ; R1.1 3830,2440 v1(3870,2480)
  Top Layer w20: v2(2050,3100) RMCU.1
  Bottom Layer w10: v1(1800,1370) 2100,1670 2100,1705 v4(2105,1710) 2300,1515 ; v1(2300,1140) 2300,1465 ; v1(2595,1170) 2300,1465 ; v1(2700,1665) 2550,1515 2300,1515 ; SWD.2 3870,2250 v1(3870,2480) ; 2300,1465 2300,1515
  Bottom Layer w20: v2(2050,3100) 2155,2995 v3(2155,2210)
pads on no net: "EN PS.4" "EN PS.6" AC1.2 AC1.3 AC1.5 AC1.10 AC1.15 IC1.2 IC1.3 IC1.4 IC1.5 IC1.6 IC1.8 IC1.9 IC1.10 IC1.11 IC1.25 IC1.26 IC1.27 IC1.28 IC1.29 IC1.30 IC1.33 IC1.37 IC1.38 IC1.39 IC1.40 IC1.41 IC1.42 IC1.43 IC1.45 IC1.50 IC1.51 IC1.52 IC1.53 IC1.54 IC1.57 U1.1 U1.2 U1.3

## Polygon pours and split planes (outlines as drawn)
NetC18_2 on Top Layer "LDOVOUT" (solid, pour order 18): 1855,3635 1850,3630 1850,3460 2245,3460 2245,3525 2235,3535 2000,3550 1985,3555 1905,3635
GND on Top Layer "LDOGND" (solid, pour order 16): 1635,3440 1640,3445 2105,3445 2105,3355 1855,3355 1850,3360 1850,3420 1725,3420 1695,3390 1635,3390
NetBT1_1 on Top Layer "TopPLUS" (solid, pour order 14): 560,3230 560,3520 1530,3520 1645,3635 1820,3635 1820,3460 865,3460 810,3405 810,3230
GND on Top Layer "TopGND" (solid, pour order 6): 560,420 560,130 810,130 810,420
GND on Bottom Layer "BotGND" (solid, remove dead copper, pour order 22): 3905,65 3900,70 3900,3620 65,3620 35,3590 55,3570 55,85 3890,85 3905,70

## Keep-outs
Keep-Out Layer:
  the board outline again, w10

## Text inside footprints (layer, text, board x,y; h text height)
"ADXL362 SPI": Top Overlay "2" at 3365,1485 h40 r270; Top Overlay "1" at 3265,1470 h40 r270; Top Overlay "7" at 3265,1015 h40 r270; Top Overlay "8" at 3365,1015 h40 r270
U2: Top Overlay "*" at 1768.5,3489.4 h50; Mechanical 13 "*" at 1798,3451.4 h50